# EAGLE board RadioLab (EAGLE 6.5.0)
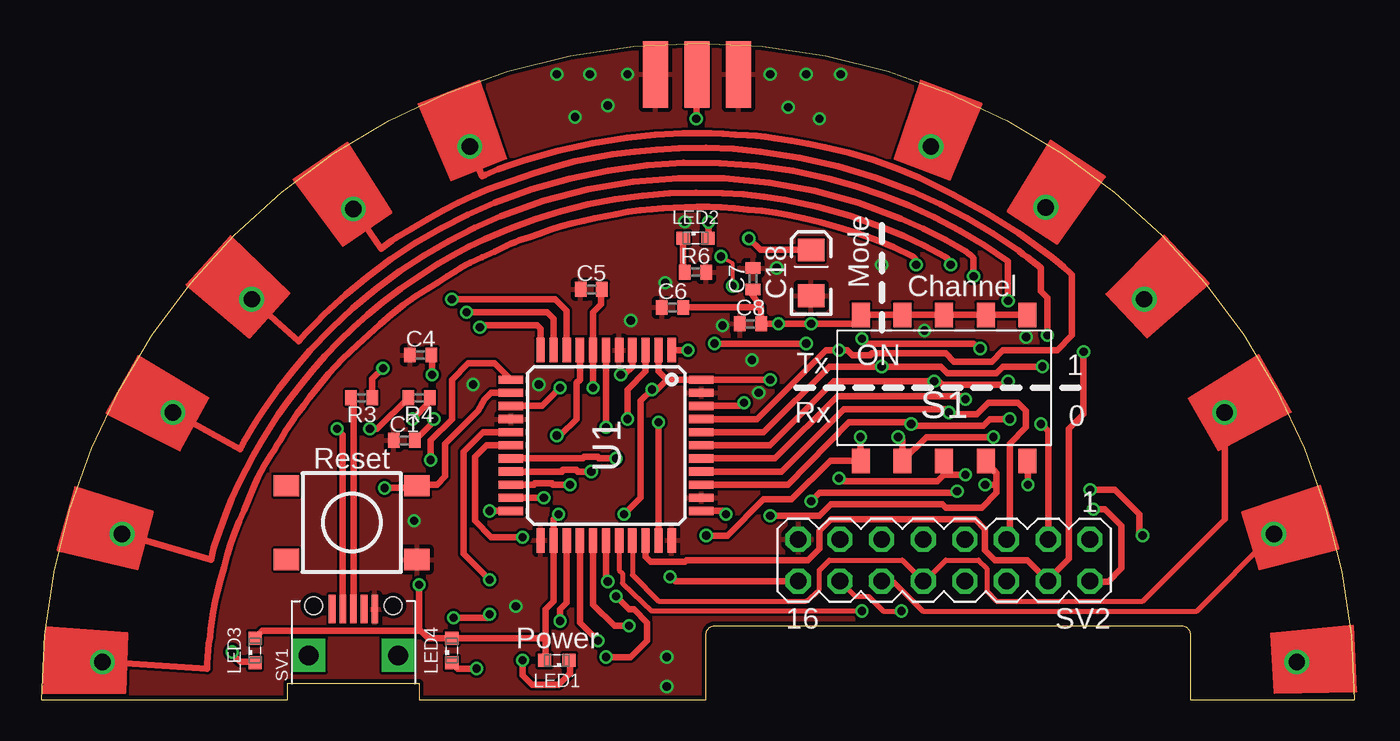
[diagram p0: board, top side]
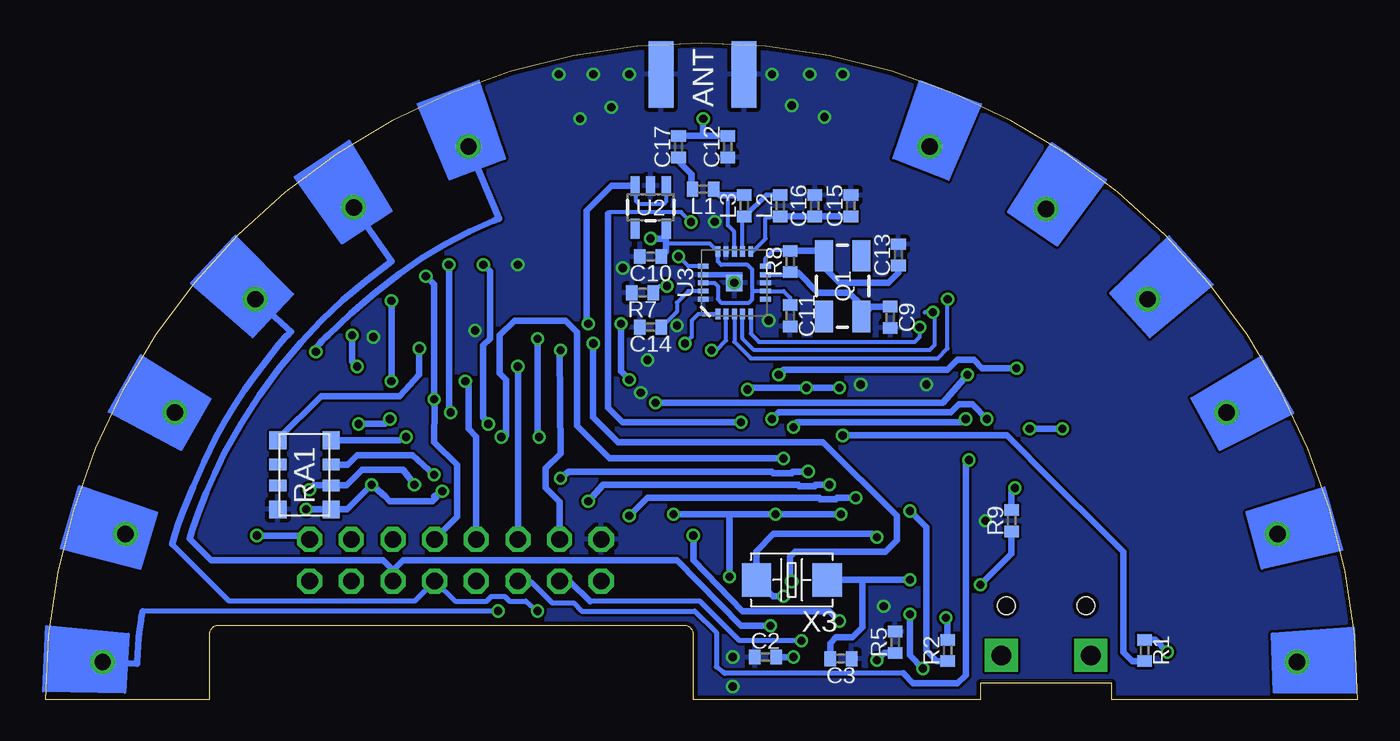
[diagram p1: board, bottom side, seen from below]

Size 80 x 40 mm. Coordinates in mm from the lower left corner, seen from the top.
Outline: 0,0 15,0 15,1 23,1 23,0 40.5,0 40.5,4 arc-90 41,4.5 69.5,4.5 arc-90 70,4 70,0 80,0 arc180 0,0
Copper layers (1*16): Top 0.035mm / dielectric 1.5mm / Bottom 0.035mm
Design rules "ITead_rule": minimum track width 6mil, minimum drill 12mil, track to track 6mil, track to pad 6mil, pad to pad 6mil, via to via 6mil, smd to smd 0mil, copper to edge 10mil, drill to drill 10mil, minimum pad ring 10mil, minimum via ring 6mil, stop-mask expansion 2mil, vias tented up to drill 100mil, thermal gap 10mil
Net classes: 1 vcc: width 0.254 mm

## Footprints (pad centres in the part's own frame; a part is rotated, then mirrored left to right if it is on the bottom)
SMA-EDGE = smd 1.524 x 4.064: GND@0 0,0; GND@1 5.08,0; SIG 2.54,0 | smd 1.524 x 4.064 bottom: GND@2 0,0; GND@3 5.08,0
0402 = smd 0.7 x 0.9: 1 -0.65,0; 2 0.65,0
EIA3216 = smd 1.4 x 1.6: A 1.4,0; C -1.4,0
LED0402 = smd 0.8 x 0.8: A 0.75,0; C -0.75,0
CRYSTAL-SMD-5X3 = smd 1.9 x 1.1: 1 -1.85,-1.15; 2 1.85,-1.15; 3 1.85,1.15; 4 -1.85,1.15
CRA12E = smd 1.09 x 1.05: 1 -2.11,-1.625; 4 2.11,-1.625; 5 2.11,1.625; 8 -2.11,1.625 | smd 0.71 x 1.05: 2 -0.64,-1.625; 3 0.63,-1.625; 6 0.63,1.625; 7 -0.64,1.625
A6S-5104-H = smd 1.1 x 1.5: 1 -5.08,-4.45; 2 -2.54,-4.45; 3 0,-4.45; 4 2.54,-4.45; 5 5.08,-4.45; 6 5.08,4.45; 7 2.54,4.45; 8 0,4.45; 9 -2.54,4.45; 10 -5.08,4.45
TACTILE_SWITCH_TALL = smd 1.55 x 1.3: A1 -3.975,-2.25; A2 3.975,-2.25; B1 -3.975,2.25; B2 3.975,2.25
FCI-10103594-0001LF = smd 0.4 x 1.75: 1 -1.3,4.525; 2 -0.65,4.525; 3 0,4.525; 4 0.65,4.525; 5 1.3,4.525 | drill 1.2 pad 2 square: P$3 -2.725,1.7; P$4 2.725,1.7 | hole 1.05: -2.425,4.73; 2.425,4.73
MA08-2 = drill 1.016 octagon: 1 -8.89,-1.27; 2 -8.89,1.27; 3 -6.35,-1.27; 4 -6.35,1.27; 5 -3.81,-1.27; 6 -3.81,1.27; 7 -1.27,-1.27; 8 -1.27,1.27; 9 1.27,-1.27; 10 1.27,1.27; 11 3.81,-1.27; 12 3.81,1.27; 13 6.35,-1.27; 14 6.35,1.27; 15 8.89,-1.27; 16 8.89,1.27
TQFP44 = smd 1.5 x 0.5: 1 -5.8,4; 2 -5.8,3.2; 3 -5.8,2.4; 4 -5.8,1.6; 5 -5.8,0.8; 6 -5.8,0; 7 -5.8,-0.8; 8 -5.8,-1.6; 9 -5.8,-2.4; 10 -5.8,-3.2; 11 -5.8,-4; 23 5.8,-4; 24 5.8,-3.2; 25 5.8,-2.4; 26 5.8,-1.6; 27 5.8,-0.8; 28 5.8,0; 29 5.8,0.8; 30 5.8,1.6; 31 5.8,2.4; 32 5.8,3.2; 33 5.8,4 | smd 0.5 x 1.5: 12 -4,-5.8; 13 -3.2,-5.8; 14 -2.4,-5.8; 15 -1.6,-5.8; 16 -0.8,-5.8; 17 0,-5.8; 18 0.8,-5.8; 19 1.6,-5.8; 20 2.4,-5.8; 21 3.2,-5.8; 22 4,-5.8; 34 4,5.8; 35 3.2,5.8; 36 2.4,5.8; 37 1.6,5.8; 38 0.8,5.8; 39 0,5.8; 40 -0.8,5.8; 41 -1.6,5.8; 42 -2.4,5.8; 43 -3.2,5.8; 44 -4,5.8
SOT23-5 = smd 0.55 x 1.2: 1 -0.95,-1.3; 2 0,-1.3; 3 0.95,-1.3; 4 0.95,1.3; 5 -0.95,1.3
QFN20 = smd 1 x 1: 0 0,0 | smd 0.65 x 0.3: 1 -1.9,1; 2 -1.9,0.5; 3 -1.9,0; 4 -1.9,-0.5; 5 -1.9,-1; 11 1.9,-1; 12 1.9,-0.5; 13 1.9,0; 14 1.9,0.5; 15 1.9,1 | smd 0.3 x 0.65: 6 -1,-1.9; 7 -0.5,-1.9; 8 0,-1.9; 9 0.5,-1.9; 10 1,-1.9; 16 1,1.9; 17 0.5,1.9; 18 0,1.9; 19 -0.5,1.9; 20 -1,1.9
PAD_5MM = drill 1: PAD 0,0
2P-SMD-5X3.2 = smd 1.778 x 2.032: 1 -2.159,0; 2 2.159,0

## Placement (x,y rotation side)
ANT  SMA_EDGE  [SMA-EDGE]  37.4,38.1 0 top
C1  1uF  [0402]  22.1,15.8 0 top
C2  8.2pF  [0402]  36.1,2.6 0 bottom
C3  8.2pF  [0402]  31.5,2.5 180 bottom
C4  100nF  [0402]  23.1,21 0 top
C5  100nF  [0402]  33.5,25 0 top
C6  100nF  [0402]  38.45,23.9 0 top
C7  100nF  [0402]  43.35,25.65 90 top
C8  100nF  [0402]  43.2,22.9 0 top
C9  22pF  [0402]  28.5,23.3 270 bottom
C10  10nF  [0402]  43.1,27 180 bottom
C11  1nF  [0402]  34.6,23.4 270 bottom
C12  1.0pF  [0402]  38.4,33.7 90 bottom
C13  22pF  [0402]  28,27.1 90 bottom
C14  33nF  [0402]  43.1,22.7 180 bottom
C15  2.2nF  [0402]  30.9,30.1 90 bottom
C16  4.7pF  [0402]  33.1,30.1 90 bottom
C17  1.5pF  [0402]  41.4,33.7 90 bottom
C18  10uF  [EIA3216]  46.9,26 90 top
L1  3.9nH  [0402]  39.9,31.1 180 bottom
L2  2.7nH  [0402]  35.2,30.1 90 bottom
L3  8.2nH  [0402]  37.4,30.1 90 bottom
LED1  Green  [LED0402]  31.4,2.4 180 top
LED2  Blue  [LED0402]  39.85,28.12 0 top
LED3  Yellow  [LED0402]  13,3 90 top
LED4  Yellow  [LED0402]  25,3 90 top
Q1  16MHz  [CRYSTAL-SMD-5X3]  31.4,25.2 90 bottom
R1  1k  [0402]  13,3 270 bottom
R2  1k  [0402]  25,3 90 bottom
R3  22  [0402]  19.5,18.4 180 top
R4  22  [0402]  23,18.4 180 top
R5  470  [0402]  28.2,3.5 90 bottom
R6  470  [0402]  39.85,26.05 0 top
R7  22K  [0402]  43.6,24.8 180 bottom
R8  1M  [0402]  34.6,26.7 90 bottom
R9  10k  [0402]  21.1,10.9 90 bottom
RA1  RESISTOR_ARRAY_8PIN  [CRA12E]  64.2,13.7 90 bottom
S1  A6S-5104-H  [A6S-5104-H]  55,19 0 top
S2  Reset  [TACTILE_SWITCH_TALL]  18.9,10.79 0 top
SV1  USB  [FCI-10103594-0001LF]  19,1 0 top
SV2  [MA08-2]  55,8.5 180 top
U1  ATMEGA32U4-AU  [TQFP44]  34.4,15.5 270 top
U2  V_REG_LDOSMD  [SOT23-5]  43.1,30 180 bottom
U3  NRF24L01SMD  [QFN20]  38,25.4 90 bottom
U$1  PIN_PAD_CIRCLE_R50  [PAD_5MM]  3.7,2.3 40.5 top
U$2  PIN_PAD_CIRCLE_R50  [PAD_5MM]  4.9,10.1 27.2 top
U$3  PIN_PAD_CIRCLE_R50  [PAD_5MM]  8,17.5 13.8 top
U$4  PIN_PAD_CIRCLE_R50  [PAD_5MM]  12.8,24.4 0.5 top
U$5  PIN_PAD_CIRCLE_R50  [PAD_5MM]  19,29.9 347.2 top
U$6  PIN_PAD_CIRCLE_R50  [PAD_5MM]  26.1,33.7 333.8 top
U$7  PIN_PAD_CIRCLE_R50  [PAD_5MM]  54.2,33.7 292 top
U$8  PIN_PAD_CIRCLE_R50  [PAD_5MM]  61.2,30 279.2 top
U$9  PIN_PAD_CIRCLE_R50  [PAD_5MM]  67.2,24.4 265.8 top
U$10  PIN_PAD_CIRCLE_R50  [PAD_5MM]  72.1,17.5 252.5 top
U$11  PIN_PAD_CIRCLE_R50  [PAD_5MM]  75.1,10.1 239.2 top
U$12  PIN_PAD_CIRCLE_R50  [PAD_5MM]  76.5,2.3 225.8 top
X3  16MHz  [2P-SMD-5X3.2]  34.5,7.3 180 bottom

## Library data of the parts
ANT C18 Q1 U2 U3 = SparkFun
C1-C17 L1-L3 LED1-LED4 R1-R9 = SpaceDIY_passive_components
RA1 = SpaceDIY_IC
S1 U$1-U$12 = SpaceDIY_connectors
S2 = Testing
SV1 = daspilker
SV2 = con-lstb; OC_FARNELL: unknown; OC_NEWARK: unknown
U1 = adafruit
X3 = Discrete

## Nets
3.3V: C10.1 C11.1 C18.A U2.5 U3.7 U3.15 U3.18
A0: SV2.3 U1.36 U$1.PAD
A1: SV2.5 U1.37 U$2.PAD
A2: SV2.7 U1.38 U$3.PAD
A3: SV2.9 U1.39 U$4.PAD
A4: SV2.11 U1.40 U$5.PAD
A5: SV2.13 U1.41 U$6.PAD
ANT: C17.1 L1.2
AREF: C4.2 U1.42
D0: RA1.1 S1.5 SV2.2 U1.20
D1: RA1.2 S1.4 SV2.1 U1.21
D2: RA1.3 S1.3 U1.19
D3: RA1.4 S1.2 U1.18
D4: RA1.5 S1.1 U1.25
D5: SV2.4 U1.31 U$7.PAD
D6: SV2.6 U1.27 U$8.PAD
D7: U1.1 U3.2
D8: U1.28 U3.1
D9: SV2.8 U1.29 U$9.PAD
D10: SV2.10 U1.30 U$10.PAD
D11: SV2.12 U1.12 U$11.PAD
D12: SV2.14 U1.26 U$12.PAD
D13: LED2.A U1.32
D14: U1.11 U3.5
D15: U1.9 U3.3
D16: U1.10 U3.4
D17/PB0/RXLED1: R1.2 U1.8
D+: R3.1 U1.4
D-: R4.1 U1.3
GND: ANT.GND@0 ANT.GND@1 ANT.GND@2 ANT.GND@3 C1.1 C2.1 C3.1 C4.1 C5.1 C6.1 C7.2 C8.1 C9.2 C10.2 C11.2 C12.1 C13.2 C14.2 C15.2 C16.2 C18.C R5.2 R6.2 R7.2 RA1.8 S2.A2 SV1.5 SV2.15 U1.5 U1.15 U1.23 U1.33 U1.35 U1.43 U2.2 U3.0 U3.8 U3.14 U3.17 U3.20
N$1: C9.1 Q1.1 R8.1 U3.9
N$2: R3.2 SV1.3
N$3: C2.2 U1.17 X3.2
N$4: R4.2 SV1.2
N$5: C13.1 Q1.3 R8.2 U3.10
N$6: LED1.C R5.1
N$7: C3.2 U1.16 X3.1
N$8: L1.1 L3.2 U3.13
N$9: LED2.C R6.1
N$10: C15.1 C16.1 L2.1 U3.11
N$11: R7.1 U3.16
N$12: C14.1 U3.19
N$13: L2.2 L3.1 U3.12
N$15: LED4.C R2.2
N$16: LED3.C R1.1
PD5/TXLED1: R2.1 U1.22
RST: R9.2 S2.B2 U1.13
TANT: ANT.SIG C12.2 C17.2
UCAP1: C1.2 U1.6
VBUS: SV1.1
VCC: C5.2 C6.2 C7.1 C8.2 LED1.A LED3.A LED4.A R9.1 S1.6 S1.7 S1.8 S1.9 S1.10 SV2.16 U1.2 U1.7 U1.14 U1.24 U1.34 U1.44 U2.1 U2.3

## Tracks (layer width: path | path; a pad name or v marks a point on that pad's centre or on a via)
3.3V  (via drill 0.5)
  Top 0.406: C18.A 43.8,27.4 v43.1,28.1
  Bottom 0.254: C11.1 34.6,24.5 35,24.9 U3.7 36.8,24.9 | 36.8,24.9 36.9,25 36.9,26.2 37.2,26.5 38.8,26.5 39,26.7 U3.15 39.5,27.8 42.1,27.8 42.15,27.75 42.15,27.3 | U3.18 39.2,25.4 39,25.2 39,24.4 38.8,24.2 37.1,24.2 36.9,24.4 36.9,24.8 36.8,24.9
  Bottom 0.406: U2.5 42.15,28 | 42.15,28 42.15,27.3 C10.1 | v43.1,28.1 42.25,28.1 42.15,28
A0  (via drill 0.5)
  Top 0.406: U$1.PAD 10.1,1.9 10.1,2.2 arc-9 10.19,3.41 arc1 10.37,4.73 arc-7 10.73,6.63 arc-1 11.31,8.79 arc-8 12.04,10.86 arc1 12.89,12.88 arc-11 13.95,14.89 arc2 14.55,15.85 arc-5 15.58,17.41 arc-2 16.72,18.93 arc-10 19.21,21.61 arc-1 21.34,23.48 arc-10 23.57,25.08 arc3 25.22,26.12 arc-10 26.11,26.61 arc3 28.33,27.66 arc-8 29.1,27.98 arc1 30.97,28.62 arc-8 33.05,29.19 arc1 35,29.59 arc-8 37.19,29.89 arc-1 39.23,30.01 arc-7 41.39,30 arc-3 43.89,29.78 arc-7 46.43,29.34 arc-4 49.55,28.48 arc-10 53.08,27.01 arc-78 v53.3,26.5 | U1.36 45.5,13.1 49.2,16.9 52.8,16.9 52.8,16.8 v53,16.8 53.1,16.9 53,16.9 53.3,16.7 57.4,16.7 57.8,17.1 v59,17.1 | SV2.3 61.35,16.35 v60.9,16.8
  Bottom 0.406: v53.3,26.5 52.9,26.1 52.9,22 53.3,21.6 53.3,17.2 v53,16.8 | v60.9,16.8 59.3,16.8 v59,17.1
A1  (via drill 0.5)
  Top 0.406: U$2.PAD 10.33,8.54 10.42,8.97 arc-9 10.66,9.79 arc1 11.22,11.29 arc-8 12.46,14.05 arc-3 13.83,16.44 arc-8 15.71,19.11 arc-5 18.12,21.83 arc-8 20.79,24.22 arc-6 24.16,26.55 arc-7 27,28.05 arc-8 31.66,29.76 arc-10 36.63,30.72 arc-8 41.5,30.87 arc-8 45.28,30.46 arc-11 51.22,28.8 arc-8 55.04,27 arc-50 v55.4,26.5 | U1.37 45.1,13.9 48.9,17.7 55.1,17.7 v55.3,17.5 55.4,17.4 57,17.4 57.7,18.1 59.5,18.1 60,17.6 60,16.6 59,15.6 59,9.96 SV2.5
  Bottom 0.406: v55.4,26.5 55.4,17.9 v55.3,17.5
A2  (via drill 0.5)
  Top 0.406: U1.38 44.7,14.7 48.5,18.5 56.2,18.5 56.3,18.4 v56.3,18.3 | U$3.PAD 12.11,15.25 12.19,15.43 arc-7 12.48,15.99 arc-3 13.57,17.71 arc-8 16.37,21.29 arc-13 21.81,26.09 arc-13 27.98,29.45 arc-45 52.38,29.31 arc-8 56.37,27.28 arc-21 56.8,26.9 v56.8,25.8
  Bottom 0.406: SV2.7 54.9,11.14 54.9,14.3 56.3,15.7 56.27,17.87 v56.3,18.3 56.3,25.3 v56.8,25.8
A3  (via drill 0.5)
  Top 0.406: U$4.PAD 15.65,21.84 15.75,21.95 arc-4 17.22,23.47 arc-9 21.27,26.83 arc-13 27.61,30.28 arc-16 36.9,32.56 arc-20 47.97,31.75 arc-9 52.82,30.12 arc-12 58.9,26.7 v58.9,24.3 | U1.39 44.4,15.5 48.3,19.4 v54.4,19.4 54.7,19.4 54.9,19.2 58.5,19.2 58.7,19.4 v58.9,19.4
  Bottom 0.406: SV2.9 53.73,16.03 54.2,16.5 54.2,19.1 v54.4,19.4 | v58.9,24.3 v58.9,19.4
A4  (via drill 0.5)
  Top 0.406: U$5.PAD 20.7,27.48 20.84,27.6 arc-10 21.59,28.14 arc-2 24.48,29.81 arc-8 27.22,31.09 arc-5 31.41,32.5 arc-8 34.78,33.22 arc-5 38.83,33.59 arc-10 43.82,33.4 arc-16 53.1,30.96 arc-13 59.55,27.35 arc-4 60.34,26.73 60.9,26.31 60.9,24.9 61.3,24.5 v61.3,22.2 | U1.40 44,16.3 48,20.3 v51.2,20.3 54.8,20.3 55.2,19.9 58.2,19.9 58.6,20.3 v61,20.3
  Bottom 0.406: SV2.11 v51.19,20.29 v51.2,20.3 | v61.3,22.2 61.3,20.6 v61,20.3
A5  (via drill 0.5)
  Top 0.406: U$6.PAD 26.84,31.89 27.04,31.98 arc-7 29.42,32.87 arc-9 35.68,34.24 arc-10 40.79,34.5 arc-1 43.02,34.39 arc-5 44.65,34.22 arc-3 47.74,33.67 arc-13 53.49,31.79 arc-13 61.46,27.06 arc-8 62.7,25.98 62.8,25.88 62.8,22.2 61.9,21.3 58.6,21.3 57.9,20.6 55.6,20.6 55.1,21.1 50.6,21.1 50.5,21 49.4,21 49.1,21.3 v48.6,21.3 47.8,21.3 43.6,17.1 U1.41
  Bottom 0.406: SV2.13 48.65,12.05 49.5,12.9 49.5,14.1 48.6,15 48.65,21.25 v48.6,21.3
ANT
  Bottom 0.406: L1.2 40.6,31.15 40.6,32 41.4,32.8 C17.1
AREF  (via drill 0.5)
  Top 0.406: U1.42 42.6,17.9 v42.8,18.1 | v23.8,19.8 23.8,20.45 C4.2
  Bottom 0.406: v42.8,18.1 25.3,18.1 v23.8,19.8
D0  (via drill 0.5)
  Top 0.406: U1.20 30,13.1 arc-90 30.1,13.2 31.1,13.2 arc90 31.2,13.1 v32.2,13.1 | S1.5 59.9,14.37 59.9,14.3 60.1,14.1 v60.1,13.1 | v46.9,12.1 47.4,12.6 55.8,12.6 v55.8,12.7 | v64.1,11.6 64.8,11.6 65.8,10.6 65.8,8 65,7.2 63.92,7.2 SV2.2
  Bottom 0.406: v32.2,13.1 33,13.1 arc-90 33.1,13 34,13 arc90 34.1,13.1 46,13.1 v46.9,12.1 | 56.3,12.4 v55.8,12.7 56.4,12.1 59,12.1 59.3,12.4 v60.1,13.1 61.61,11.59 RA1.1 v64.09,11.59 v64.1,11.6
D1  (via drill 0.5)
  Top 0.406: U1.21 v30.6,12.3 | 57.5,14.51 S1.4 58.2,13.79 58.2,13.1 | v44.4,11.2 47.4,11.2 48.1,11.9 54.9,11.9 55.1,11.7 57.3,11.7 58.2,12.6 58.2,13.1 | v57.5,13.1 58.2,13.1 | v63.9,12.8 65.4,12.8 66.9,11.3 66.9,10.2 v67.1,10
  Bottom 0.406: v30.6,12.3 31.7,12.3 arc-90 31.8,12.2 32.7,12.2 arc90 32.8,12.3 43.3,12.3 v44.4,11.2 | v57.5,13.1 58.2,14 60.7,14 61.64,13.06 RA1.2 63.64,13.06 v63.9,12.8 | SV2.1 64.12,10 v67.1,10
D2  (via drill 0.5)
  Top 0.406: U1.19 31.7,13.9 arc-90 31.8,14 32.6,14 arc90 32.7,13.9 v33.5,13.9 | 55.05,14.6 S1.3 55,13.7 | v48.6,13.5 48.8,13.3 54.6,13.3 55,13.7 | v56.3,13.7 55,13.7
  Bottom 0.406: v33.5,13.9 34.4,13.9 arc-90 34.5,13.8 35.6,13.8 arc90 35.7,13.9 48.1,13.9 v48.6,13.5 | RA1.3 61.57,14.33 61,14.9 57.6,14.9 v56.3,13.7
D3  (via drill 0.5)
  Top 0.406: v52.2,16 52.46,15.84 S1.2 53.91,16 v58,16 | v35,14.7 34,14.7 arc-90 33.9,14.8 33.1,14.8 arc90 33,14.7 U1.18
  Bottom 0.406: v52.2,16 52,16 51.9,16.1 51.9,19.5 52.3,19.9 52.3,22.2 51.4,23.1 48.3,23.1 47.6,22.4 47.6,16.7 45.6,14.7 v35,14.7 | RA1.4 58.39,15.81 v58,16
D4  (via drill 0.5)
  Top 0.406: v49.9,16 49.9,14.57 | 49.9,14.57 S1.1 | U1.25 32,5.9 31.6,5.5 v31.6,4.8 | v57.2,21.4 56.8,21.7 50.3,21.7 v50,22 | 49.9,14.57 48.07,14.57 45.7,12.2 44,12.2 41.8,10 v40.5,10
  Bottom 0.406: RA1.5 65.83,15.88 63.2,18.5 58.4,18.5 57.2,19.8 v57.2,21.4 | v50,22 50,16 v49.9,16 | v40.5,10 40.5,8.5 37.5,5.4 32.2,5.4 v31.6,4.8
D5  (via drill 0.5)
  Top 0.406: v63.5,21.2 63.5,17.4 62.6,16.5 62.6,8.6 61.35,7.35 SV2.4 60.08,8.5 58.1,8.5 57.5,9.1 57.5,10.4 56.9,11 48.1,11 47.4,10.3 47.4,9.2 46.7,8.5 39.3,8.5 39.2,8.4 37.1,8.4 36.8,8.7 U1.31
  Bottom 0.406: U$7.PAD 52.35,29.31 52.67,29.18 arc-15 58.41,25.95 arc-8 62.77,22.22 arc-2 63.29,21.69 arc-40 v63.5,21.2
D6  (via drill 0.5)
  Top 0.406: U1.27 33.6,5.8 34.9,4.5 v35.8,4.5
  Bottom 0.406: U$8.PAD 58.9,26.7 59.04,26.6 arc-13 64.41,21.77 arc-14 69.08,15.01 arc-7 70.67,11.36 arc-3 71.2,9.8 69.9,8.5 59.4,8.5 58.8,7.9 | 58.8,7.9 58.2,8.5 41.5,8.5 37.6,4.5 v35.8,4.5 | 58.8,7.9 SV2.6
D7  (via drill 0.5)
  Top 0.406: U1.1 v39.4,21.3
  Bottom 0.254: v39.4,21.3 39.1,21.3 38.5,21.9 U3.2
D8  (via drill 0.5)
  Top 0.406: U1.28 34.4,7.2 | 34.6,7.3 34.4,7.2 | 34.4,7.2 v34.5,7.2 | v46.6,21.7 v41,21.7
  Bottom 0.254: U3.1 40.2,23.5 40.6,23.1 40.6,22.1 v41,21.7
  Bottom 0.406: v34.5,7.2 34.5,7.3 34.6,7.2 34.6,8.7 34.3,9 28.8,9 28.1,9.7 28.1,11.2 32.6,15.7 45.1,15.7 46.6,17.2 v46.6,21.7
D9  (via drill 0.5)
  Top 0.305: U1.29 35.2,7.9 35.4,7.7 35.4,7.1 37.2,5.4 v50,5.4
  Bottom 0.305: 56.87,7.23 SV2.8 57.5,6 68.8,6 72.27,9.47 | 56.23,7.23 55,6 53.1,6 52.8,6.3 52,6.3 51.7,6 50.7,6 v50,5.4
  Bottom 0.406: U$9.PAD 65,22.43 65.15,22.29 arc-8 65.76,21.63 arc-3 67.84,18.87 arc-9 69.57,16.01 arc-5 71.63,11.41 arc-6 72.27,9.47 | SV2.8 56.23,7.23
D10
  Top 0.305: 72.1,11 67.1,6 58.2,6 57.6,6.6 57.6,8 57.1,8.5 55.1,8.5 53.83,7.23 | U1.30 36,7.6 37.6,6 46.6,6 47.4,6.7 47.4,7.9 48,8.5 52.46,8.5 SV2.10
  Top 0.406: 72.1,11 U$10.PAD | SV2.10 53.83,7.23
D11  (via drill 0.5)
  Top 0.305: U$11.PAD 70.4,5.4 53.7,5.4 51.87,7.23 SV2.12
  Top 0.406: U1.12 27.6,20.5 26,20.5 25,19.5 25,17.1 23.7,15.8 v23.7,14.6
  Bottom 0.305: SV2.12 50.39,7.19 49.1,5.9 47.8,5.9 47.3,5.4 40.4,5.4 39.1,4.1 39.1,2 38.7,1.7 38.6,1.6 27.7,1.6
  Bottom 0.406: 27.7,1.6 27.1,1 24.4,1 23.9,1.5 23.9,14.4 v23.7,14.6
D12  (via drill 0.5)
  Top 0.305: SV2.14 49.6,6.3 50.4,6.3 51.3,5.4 v52.4,5.4
  Top 0.406: U1.26 32.8,4.7 v33.9,3.6 33.7,3.9
  Bottom 0.305: v33.9,3.6 37.7,3.6 40.1,6 46.8,6 | v52.4,5.4 74.07,5.4
  Bottom 0.406: 46.8,6 48,7.2 48.6,7.18 SV2.14 | U$12.PAD 74.4,2.18 74.39,2.32 arc0 74.29,3.76 arc6 74.16,4.83 arc13 74.07,5.4
D13  (via drill 0.5)
  Top 0.406: U1.32 v37.6,16.9 | v40.65,29.1 40.65,28.18 LED2.A
  Bottom 0.254: 45.7,29.6 45.6,29.7 41.25,29.7 v40.65,29.1
  Bottom 0.406: v37.6,16.9 44.8,16.9 45.7,17.8 45.7,29.6
D14  (via drill 0.5)
  Top 0.406: U1.11 30.4,22.6 30.2,22.8 26.9,22.8 v26.7,22.7
  Bottom 0.254: U3.5 37,22.3 36.5,21.8 27,21.8 26.7,22.1 v26.7,22.7
D15  (via drill 0.5)
  Top 0.406: v25,24.4 31.3,24.4 32,23.7 U1.9
  Bottom 0.254: U3.3 38,21.8 37,20.8 25.6,20.8 25,21.4 v25,24.4
D16  (via drill 0.5)
  Top 0.406: U1.10 31.2,23.2 30.8,23.6 v25.9,23.6
  Bottom 0.254: 26.4,23.6 v25.9,23.6 25.8,23.6 25.8,21.6 26.1,21.3 36.8,21.3 37.5,22 U3.4
D17/PB0/RXLED1  (via drill 0.5)
  Top 0.406: v31.4,16.1 31.6,16.1 32.6,17.1 32.6,19.3 32.8,19.5 U1.8
  Bottom 0.406: v31.4,16.1 21.4,16.1 20.15,14.85 19.8,14.5 14.3,9 14.3,2.9 13.75,2.35 R1.2
D+  (via drill 0.5)
  Top 0.406: R3.1 20.15,19.55 v20.8,20.2 | v35.3,19.8 35.5,19.8 36,20.3 U1.4
  Bottom 0.406: v20.8,20.2 22.9,20.2 23.4,20.7 24.4,20.7 25,20.1 35,20.1 v35.3,19.8
D-  (via drill 0.5)
  Top 0.406: R4.1 23.65,18.15 v22.6,17.1 | v35.7,17.1 35.7,18.9 36.8,20 U1.3
  Bottom 0.406: v22.6,17.1 23.5,18 24.3,18 24.8,17.5 35.3,17.5 v35.7,17.1
GND  (via drill 0.5)
  Bottom 0.254: U3.0 38.2,25.4
  other vias: 38.1,2.6 38.1,0.8 43.7,18.7 26.3,19.2 60,22.1 43.3,20.7 53.8,22.5 44.8,26.3 41.5,22.8 39.2,29.12 35.9,23.1 35.7,38.1 51.2,26.5 33.4,38.1 31.4,38.1 32.5,35.5 34.5,36.2 45.5,36.1 47.4,35.4 48.7,38.1 46.6,38.1 44.4,38.1 30.3,19.2 22.7,10.9 28.9,5.7 38,25.4
  pour Top: 0,0 arc-90 40,40 40.5,40 arc-90 80,0.5 80,0 70,0 70,4 arc90 69.5,4.5 41,4.5 arc90 40.5,4 40.5,0 23,0 23,1 15,1 15,0
  pour Bottom: 0,0 arc-90 40,40 40.5,40 arc-90 80,0.5 80,0 70,0 70,4 arc90 69.5,4.5 41,4.5 arc90 40.5,4 40.5,0 23,0 23,1 15,1 15,0
N$1
  Bottom 0.254: U3.9 34.75,25.9 R8.1
  Bottom 0.406: C9.1 29.65,23.95 Q1.1 30.25,24.05 31,24.8 32.9,24.8 34.1,26 34.55,26 R8.1
N$2
  Top 0.406: SV1.3 19,18.25 R3.2
N$3  (via drill 0.5)
  Top 0.406: U1.17 27.1,15.5 26.4,14.8 26.4,10.9 27.4,9.9 v29.3,9.9 | v34.4,2.6 35.9,2.6 36.9,3.6 36.9,4.7 36.1,5.5 35.8,5.5 v35,6.3
  Bottom 0.406: v29.3,9.9 29.6,10.1 35.6,10.1 36.66,9.04 X3.2 35.66,6.3 v35,6.3 | C2.2 v34.4,2.6
N$4  (via drill 0.5)
  Top 0.406: SV1.2 18.35,16.15 v18,16.5 | v20,16.5 20.45,16.5 R4.2
  Bottom 0.406: v18,16.5 v20,16.5
N$5
  Bottom 0.254: U3.10 36.1,26.9 35.6,27.4 34.65,27.4 R8.2
  Bottom 0.406: C13.1 28,26 28.6,25.4 31.6,25.4 32.6,26.4 32.6,27 Q1.3 32.85,27.35 R8.2
N$6  (via drill 0.5)
  Top 0.406: v29.3,2.4 29.3,1.5 29.9,0.9 31.5,0.9 32.2,1.6 32.2,2.35 LED1.C
  Bottom 0.406: R5.1 28.85,2.85 v29.3,2.4
N$7  (via drill 0.5)
  Top 0.406: U1.16 26.9,16.3 25.7,15.1 25.7,8.9 v27.3,7.3
  Bottom 0.406: v27.3,7.3 30.2,7.3 | 30.2,7.3 X3.1 | C3.2 32.15,3.45 31.8,3.8 30.8,3.8 30.2,4.4 30.2,7.3
N$8
  Bottom 0.254: U3.13 38,28.5 38.4,28.9 38.4,30.75
  Bottom 0.406: L1.1 38.9,30.75 38.4,30.75 L3.2
N$9
  Top 0.406: R6.1 39.1,26.05 LED2.C
N$10
  Bottom 0.254: U3.11 36.9,27.3 36.1,28.1 36.1,29.35 L2.1
  Bottom 0.406: L2.1 C16.1 C15.1
N$11  (via drill 0.5)
  Top 0.254: v41.4,27 42.1,26.6 v42.1,25.2
  Bottom 0.254: U3.16 40.8,26.4 v41.4,27 | v42.1,25.2 42.55,25.2 R7.1
N$12
  Bottom 0.254: U3.19 40.8,24.9 41.5,24.2 41.5,23.65 C14.1
N$13
  Bottom 0.254: U3.12 37.5,29.45 L3.1
  Bottom 0.305: L2.2 36.05,30.75 37.35,29.45 L3.1
  Bottom 0.406: 37.3,29.45 L3.1
N$15  (via drill 0.5)
  Top 0.406: v25.1,5 27.1,5 v27.3,5.2 | v26.5,1.9 25.35,1.9 LED4.C
  Bottom 0.406: R2.2 25,4.9 v25.1,5 | v27.3,5.2 27.3,2.7 v26.5,1.9
N$16  (via drill 0.5)
  Top 0.406: v11.6,2.9 11.6,2.8 12.1,2.3 12.95,2.3 LED3.C
  Bottom 0.406: R1.1 12.35,3.65 v11.6,2.9
PD5/TXLED1  (via drill 0.5)
  Top 0.406: U1.22 v27.3,11.5
  Bottom 0.406: R2.1 25.65,2.35 26.3,3 26.3,10.5 v27.3,11.5
RST  (via drill 0.5)
  Top 0.406: U1.13 27.4,18.7 27,18.3 26.6,17.6 24.6,15.6 24.6,13.6 24.1,13.1 22.93,13.1 S2.B2 22.73,12.9 v20.9,12.9
  Bottom 0.406: R9.2 21.1,12.7 v20.9,12.9
TANT  (via drill 0.5)
  Top 0.406: ANT.SIG 39.9,38.06 v39.9,35.4
  Bottom 0.406: C12.2 39.9,34.35 | 39.9,34.35 C17.2 | v39.9,35.4 39.9,34.35
UCAP1  (via drill 0.5)
  Top 0.406: C1.2 23.9,16.94 v23.9,17.1 | v34.4,16.6 U1.6
  Bottom 0.406: v23.9,17.1 24,17.1 24.2,16.9 34.1,16.9 arc-90 v34.4,16.6
VCC  (via drill 0.5)
  Top 0.406: U1.2 37.6,20 38.1,19.5 | 38.1,19.5 U1.44 v44.4,19.5 | S1.6 S1.7 S1.8 S1.9 S1.10 49.9,23.43 49.9,22.9 v46.9,22.9 v44.9,22.9 C8.2 43.85,23.9 | v41.7,11.3 41.5,11.5 U1.34 | v31.5,11.3 31.2,11 U1.24 31.2,6 30.7,5.5 30.7,4 | SV2.16 38.63,7.23 v38.3,7.5 | v35.5,11.3 36.5,12.3 36.5,18.2 v37.2,18.9 37.5,18.9 38.1,19.5 | U1.14 30.5,17.9 v31.6,19 | v33.6,19 U1.7 33.6,23.6 34.1,24.1 34.1,24.95 C5.2 | 30.7,4 30.7,2.45 LED1.A | 43.85,23.9 43.3,24.7 43.35,24.7 C7.1 | C6.2 43.85,23.9 | 30.7,4 30.45,3.75 LED4.A 23.55,3.75 23.1,4.2 | 23.1,4.2 13.45,4.2 LED3.A | v23,7 23,4.3 23.1,4.2
  Bottom 0.254: U2.1 42.15,30.35 42.3,30.2 43.8,30.2 44,30.4 44,31.25 U2.3
  Bottom 0.406: v31.5,11.3 v35.5,11.3 38.3,11.3 | 38.3,11.3 v41.7,11.3 | v38.3,7.5 38.3,11.3 | v31.6,19 v33.6,19 37.1,19 v37.2,18.9 | U2.3 45.5,31.3 47,29.8 47,23 v46.9,22.9 | v44.9,22.9 44.9,20 v44.4,19.5 | R9.1 21.1,8.9 v23,7
(copper drawn outside any net)
  shapes: Bottom area x1

## Text on the board
tNames: Mode | Channel | Tx | 1 | Rx | 0 | Reset | Power
bNames: ANT